# EAGLE board RSP2NRF (EAGLE 7.1.0)
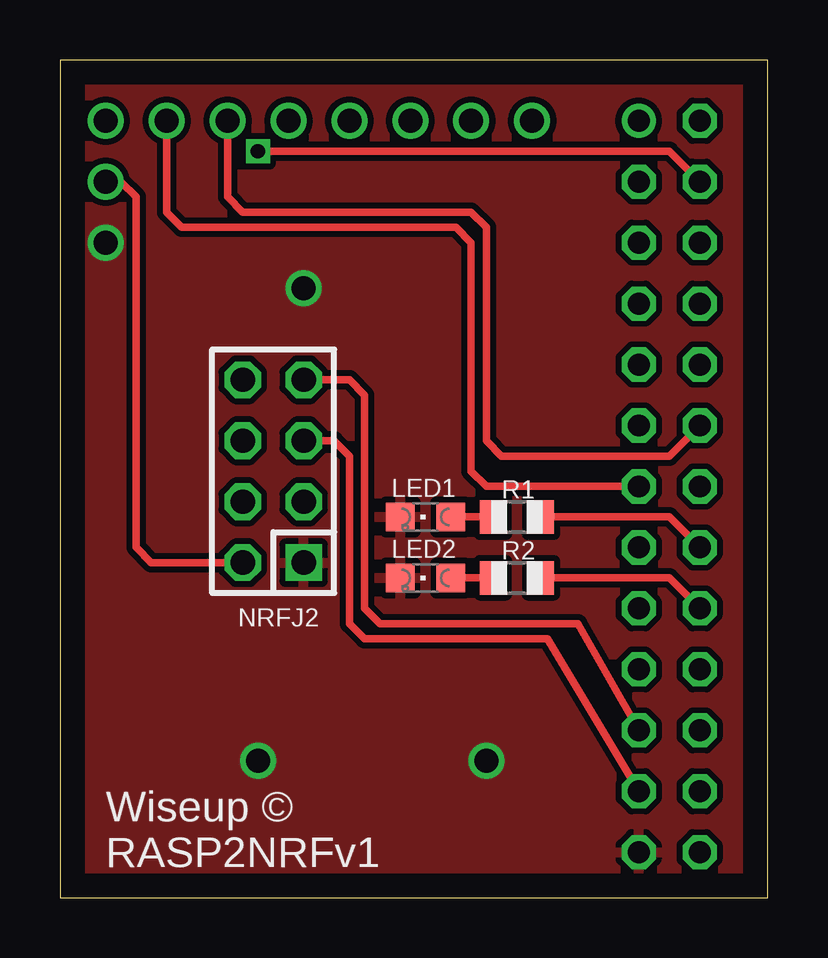
[diagram p0: board, top side]
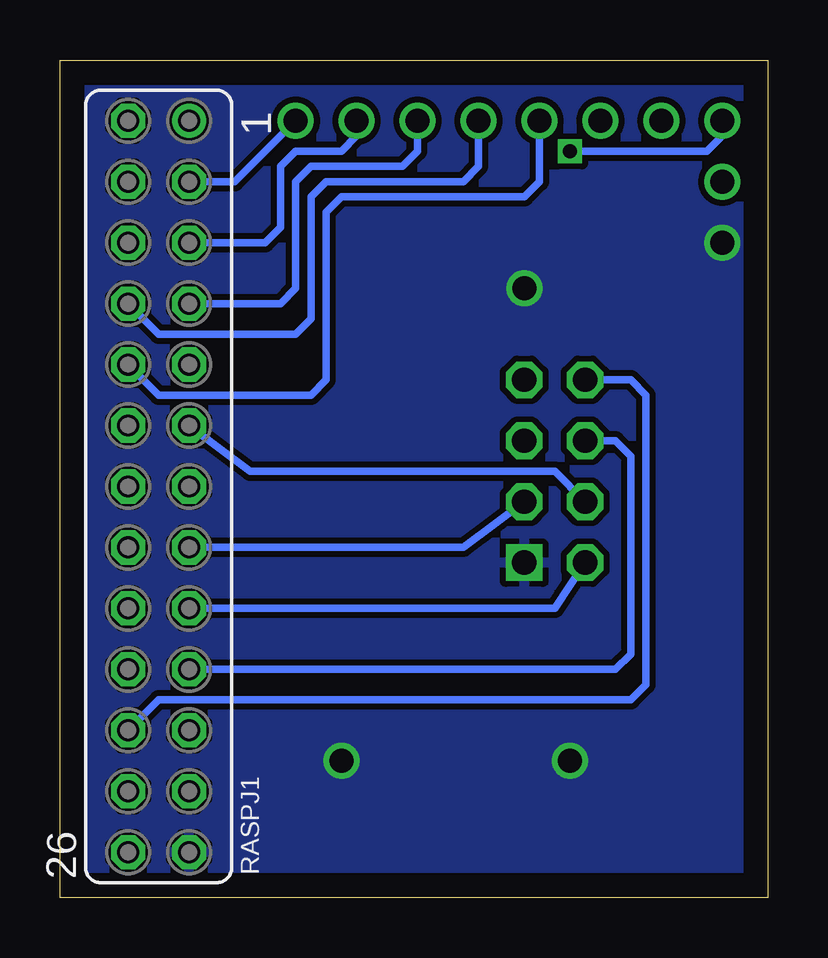
[diagram p1: board, bottom side, seen from below]

Size 29.52 x 34.91 mm. Coordinates in mm from the lower left corner, seen from the top.
Outline: 0,0 29.52,0 29.52,34.91 0,34.91 0,0
Copper layers (1*16): Top 0.035mm / dielectric 1.5mm / Bottom 0.035mm
Design rules "default": minimum track width 10mil, minimum drill 24mil, track to track 8mil, track to pad 8mil, pad to pad 8mil, via to via 8mil, smd to smd 8mil, copper to edge 40mil, drill to drill 8mil, minimum pad ring 10mil, minimum via ring 8mil, stop-mask expansion 4mil, vias tented up to drill 0mil, thermal gap 10mil
Net classes: 0 default: width 0.305 mm, drill 0.508 mm, clearance 0.254 mm

## Footprints (pad centres in the part's own frame; a part is rotated, then mirrored left to right if it is on the bottom)
CHIPLED_0805 = smd 1.2 x 1.2: A 0,-1.05; C 0,1.05
DIL-100-2X04 = drill 1.016 square: 1 -3.81,-1.27 | drill 1.016 octagon: 2 -3.81,1.27; 3 -1.27,-1.27; 4 -1.27,1.27; 5 1.27,-1.27; 6 1.27,1.27; 7 3.81,-1.27; 8 3.81,1.27
R0805 = smd 1.1 x 1.4: 1 -1,0; 2 1,0
FE13-2 = drill 0.914: 1 -15.24,1.27 | drill 0.914 octagon: 2 -15.24,-1.27; 3 -12.7,1.27; 4 -12.7,-1.27; 5 -10.16,1.27; 6 -10.16,-1.27; 7 -7.62,1.27; 8 -7.62,-1.27; 9 -5.08,1.27; 10 -5.08,-1.27; 11 -2.54,1.27; 12 -2.54,-1.27; 13 0,1.27; 14 0,-1.27; 15 2.54,1.27; 16 2.54,-1.27; 17 5.08,1.27; 18 5.08,-1.27; 19 7.62,1.27; 20 7.62,-1.27; 21 10.16,1.27; 22 10.16,-1.27; 23 12.7,1.27; 24 12.7,-1.27; 25 15.24,1.27; 26 15.24,-1.27

## Placement (x,y rotation side)
LED1  [CHIPLED_0805]  15.24,15.88 90 top
LED2  [CHIPLED_0805]  15.24,13.34 90 top
NRFJ2  F-2X04-DIL-100  [DIL-100-2X04]  8.89,17.78 90 top
R1  1k  [R0805]  19.05,15.88 180 top
R2  1k  [R0805]  19.05,13.34 180 top
RASPJ1  [FE13-2]  25.4,17.14 270 bottom

## Library data of the parts
LED1 LED2 R1 R2 = adafruit
NRFJ2 = con-headers-jp
RASPJ1 = con-lsta; OC_FARNELL: unknown; OC_NEWARK: unknown

## Nets
GND: LED1.C LED2.C NRFJ2.1 RASPJ1.25
IRQ: NRFJ2.8 RASPJ1.22
N$1: NRFJ2.5 RASPJ1.23
N$2: NRFJ2.7 RASPJ1.21
N$3: NRFJ2.6 RASPJ1.19
N$4: RASPJ1.4
N$6: R2.1 RASPJ1.18
N$7: NRFJ2.4 RASPJ1.11
N$8: NRFJ2.3 RASPJ1.15
N$9: LED2.A R2.2
N$10: R1.1 RASPJ1.16
N$11: LED1.A R1.2
N$18: RASPJ1.3
N$19: RASPJ1.5
N$20: RASPJ1.7
N$21: RASPJ1.8
N$22: RASPJ1.10
N$23: RASPJ1.12
S$2: RASPJ1.13
VCC: NRFJ2.2 RASPJ1.17

## Tracks (layer width: path | path; a pad name or v marks a point on that pad's centre or on a via)
GND  (via drill 1 pad 0.25)
  other vias: 8.26,5.71 10.16,25.4 17.78,5.71 1.91,27.3
  pour Top: -1.27,36.83 31.11,36.83 31.11,-1.91 -1.27,-1.91
  pour Bottom: -0.64,36.2 30.48,36.2 30.48,-0.64 -0.64,-0.64
IRQ
  Bottom 0.305: NRFJ2.8 5.71,21.59 5.08,20.95 5.08,8.89 5.71,8.26 25.4,8.26 RASPJ1.22
N$1
  Top 0.305: NRFJ2.5 11.43,19.05 12.06,18.41 12.06,11.43 12.7,10.79 20.32,10.79 RASPJ1.23
N$2
  Top 0.305: RASPJ1.21 21.59,11.43 13.34,11.43 12.7,12.06 12.7,20.95 12.06,21.59 NRFJ2.7
N$3
  Bottom 0.305: NRFJ2.6 6.35,19.05 5.71,18.41 5.71,10.16 6.35,9.53 RASPJ1.19
N$4  (via drill 0.6 pad 0.25, 1)
  Top 0.305: RASPJ1.4 25.4,31.11 v8.26,31.11
  Bottom 0.305: v8.26,31.11 2.54,31.11 1.91,31.75 v1.91,32.38
N$6
  Top 0.305: RASPJ1.18 25.4,13.34 R2.1
N$7
  Bottom 0.305: NRFJ2.4 8.89,17.78 21.59,17.78 RASPJ1.11
N$8
  Bottom 0.305: NRFJ2.3 12.7,14.61 RASPJ1.15
N$9
  Top 0.305: R2.2 LED2.A
N$10
  Top 0.305: RASPJ1.16 25.4,15.88 R1.1
N$11
  Top 0.305: R1.2 LED1.A
N$18  (via drill 1 pad 0.25)
  Bottom 0.305: RASPJ1.3 22.23,29.84 v19.68,32.38
N$19  (via drill 1 pad 0.25)
  Bottom 0.305: RASPJ1.5 20.95,27.3 20.32,27.94 20.32,30.48 19.68,31.11 17.78,31.11 17.14,31.75 v17.14,32.38
N$20  (via drill 1 pad 0.25)
  Bottom 0.305: RASPJ1.7 20.32,24.77 19.68,25.4 19.68,29.84 19.05,30.48 15.24,30.48 14.61,31.11 v14.61,32.38
N$21  (via drill 1 pad 0.25)
  Bottom 0.305: RASPJ1.8 25.4,23.5 19.68,23.5 19.05,24.13 19.05,29.21 18.41,29.84 12.7,29.84 12.06,30.48 v12.06,32.38
N$22  (via drill 1 pad 0.25)
  Bottom 0.305: RASPJ1.10 25.4,20.95 19.05,20.95 18.41,21.59 18.41,28.57 17.78,29.21 10.16,29.21 9.53,29.84 v9.53,32.38
N$23  (via drill 1 pad 0.25)
  Top 0.305: RASPJ1.12 25.4,18.41 18.41,18.41 17.78,19.05 17.78,27.94 17.14,28.57 7.62,28.57 6.99,29.21 v6.99,32.38
S$2  (via drill 1)
  Top 0.305: RASPJ1.13 17.78,17.14 17.14,17.78 17.14,27.3 16.51,27.94 5.08,27.94 4.45,28.57 v4.45,32.38
VCC  (via drill 1)
  Top 0.305: NRFJ2.2 3.81,13.97 3.17,14.61 3.17,29.21 2.54,29.84 v1.91,29.84
  Bottom 0.305: NRFJ2.2 8.89,12.06 RASPJ1.17

## Text on the board
tPlace: Wiseup © | RASP2NRFv1